# EAGLE board Tema1TSC v59 (EAGLE 9.7.0)
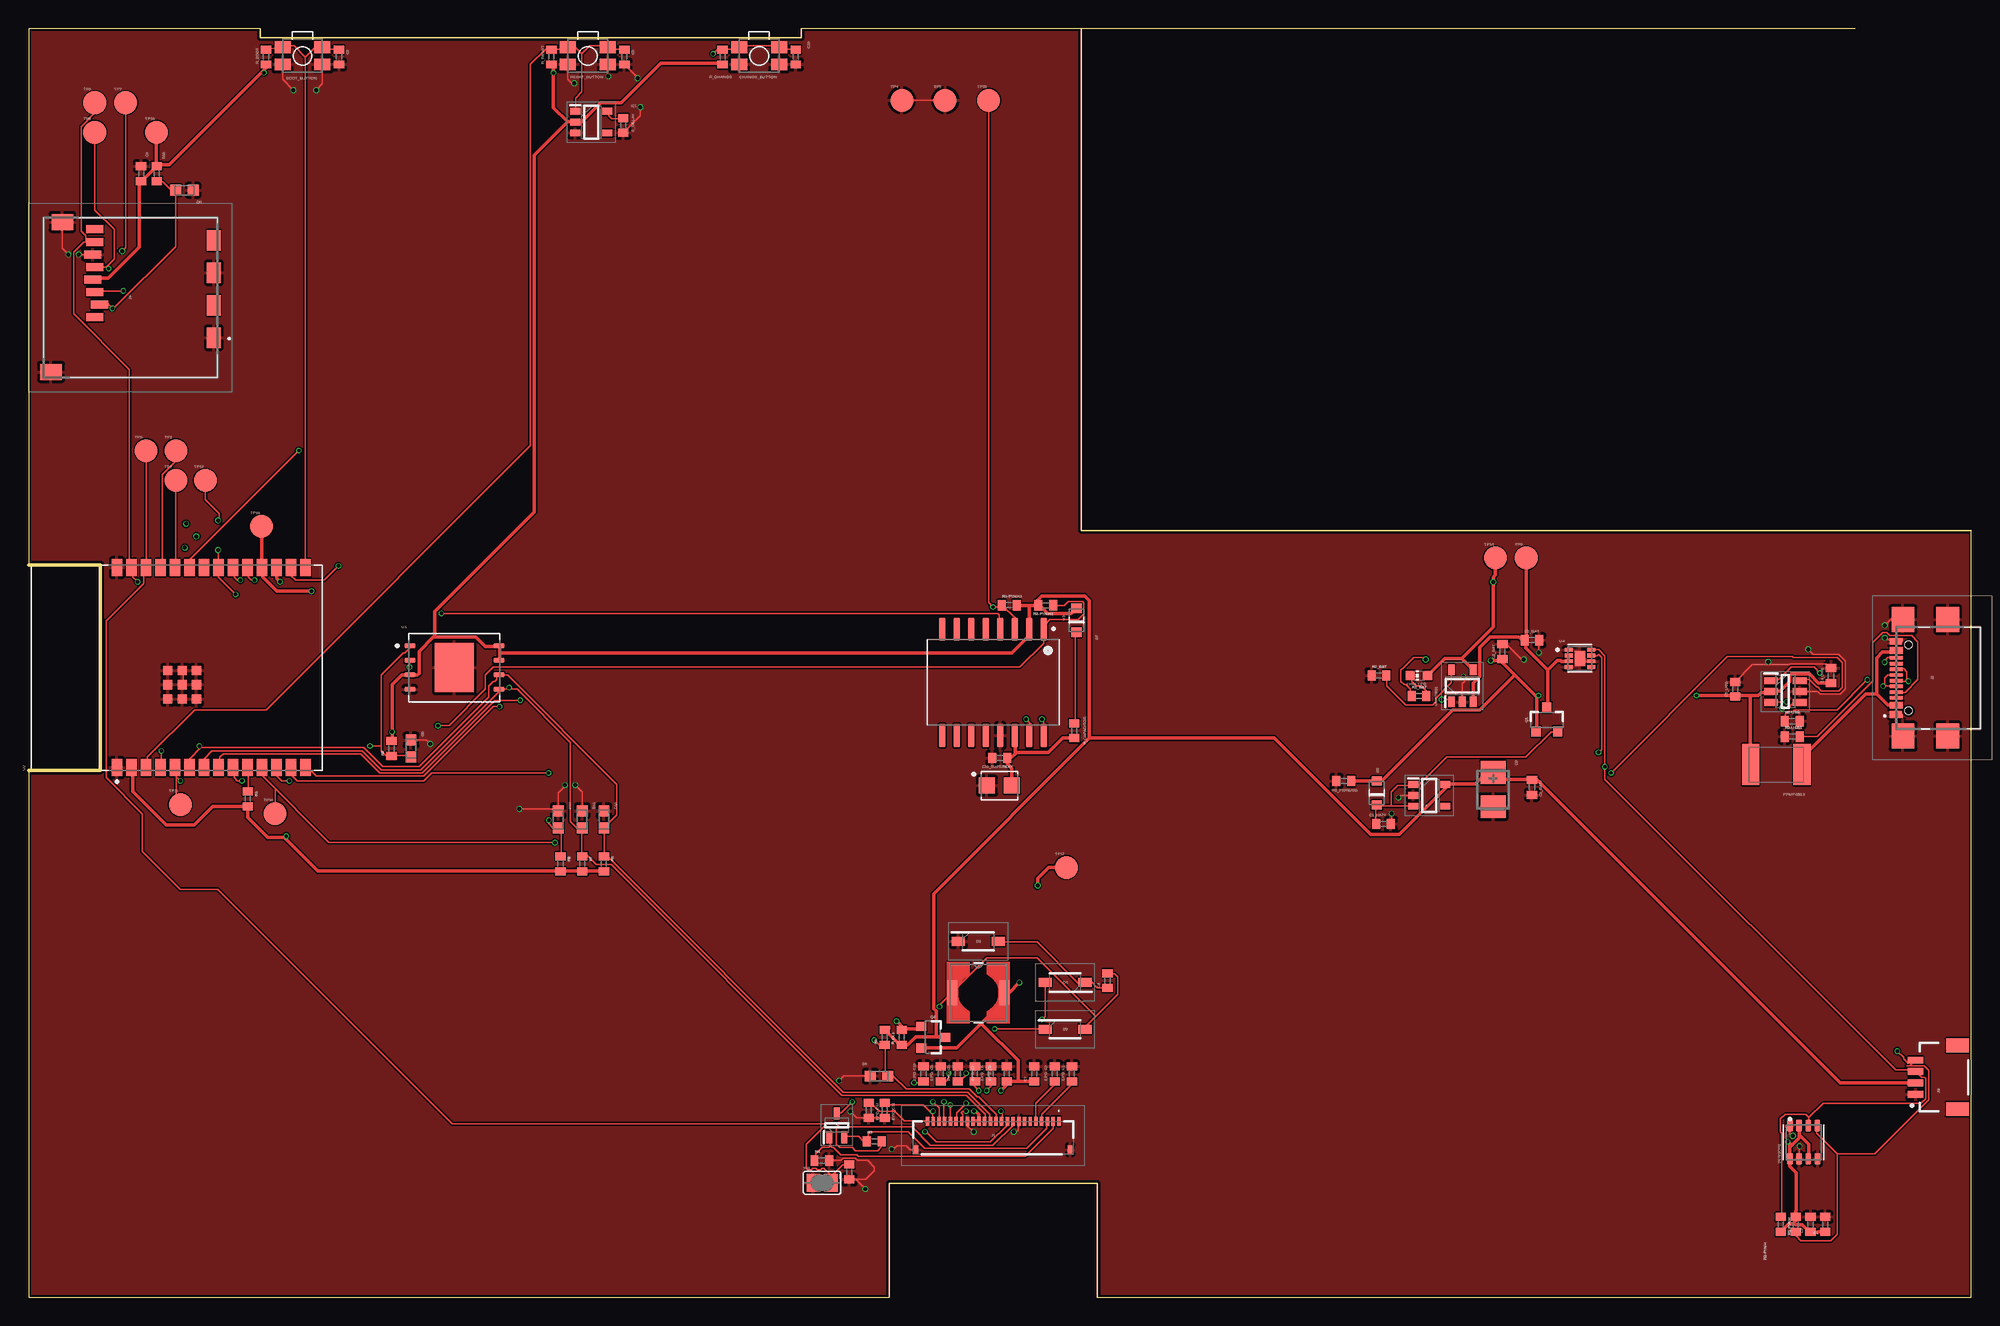
[diagram p0: board, top side]
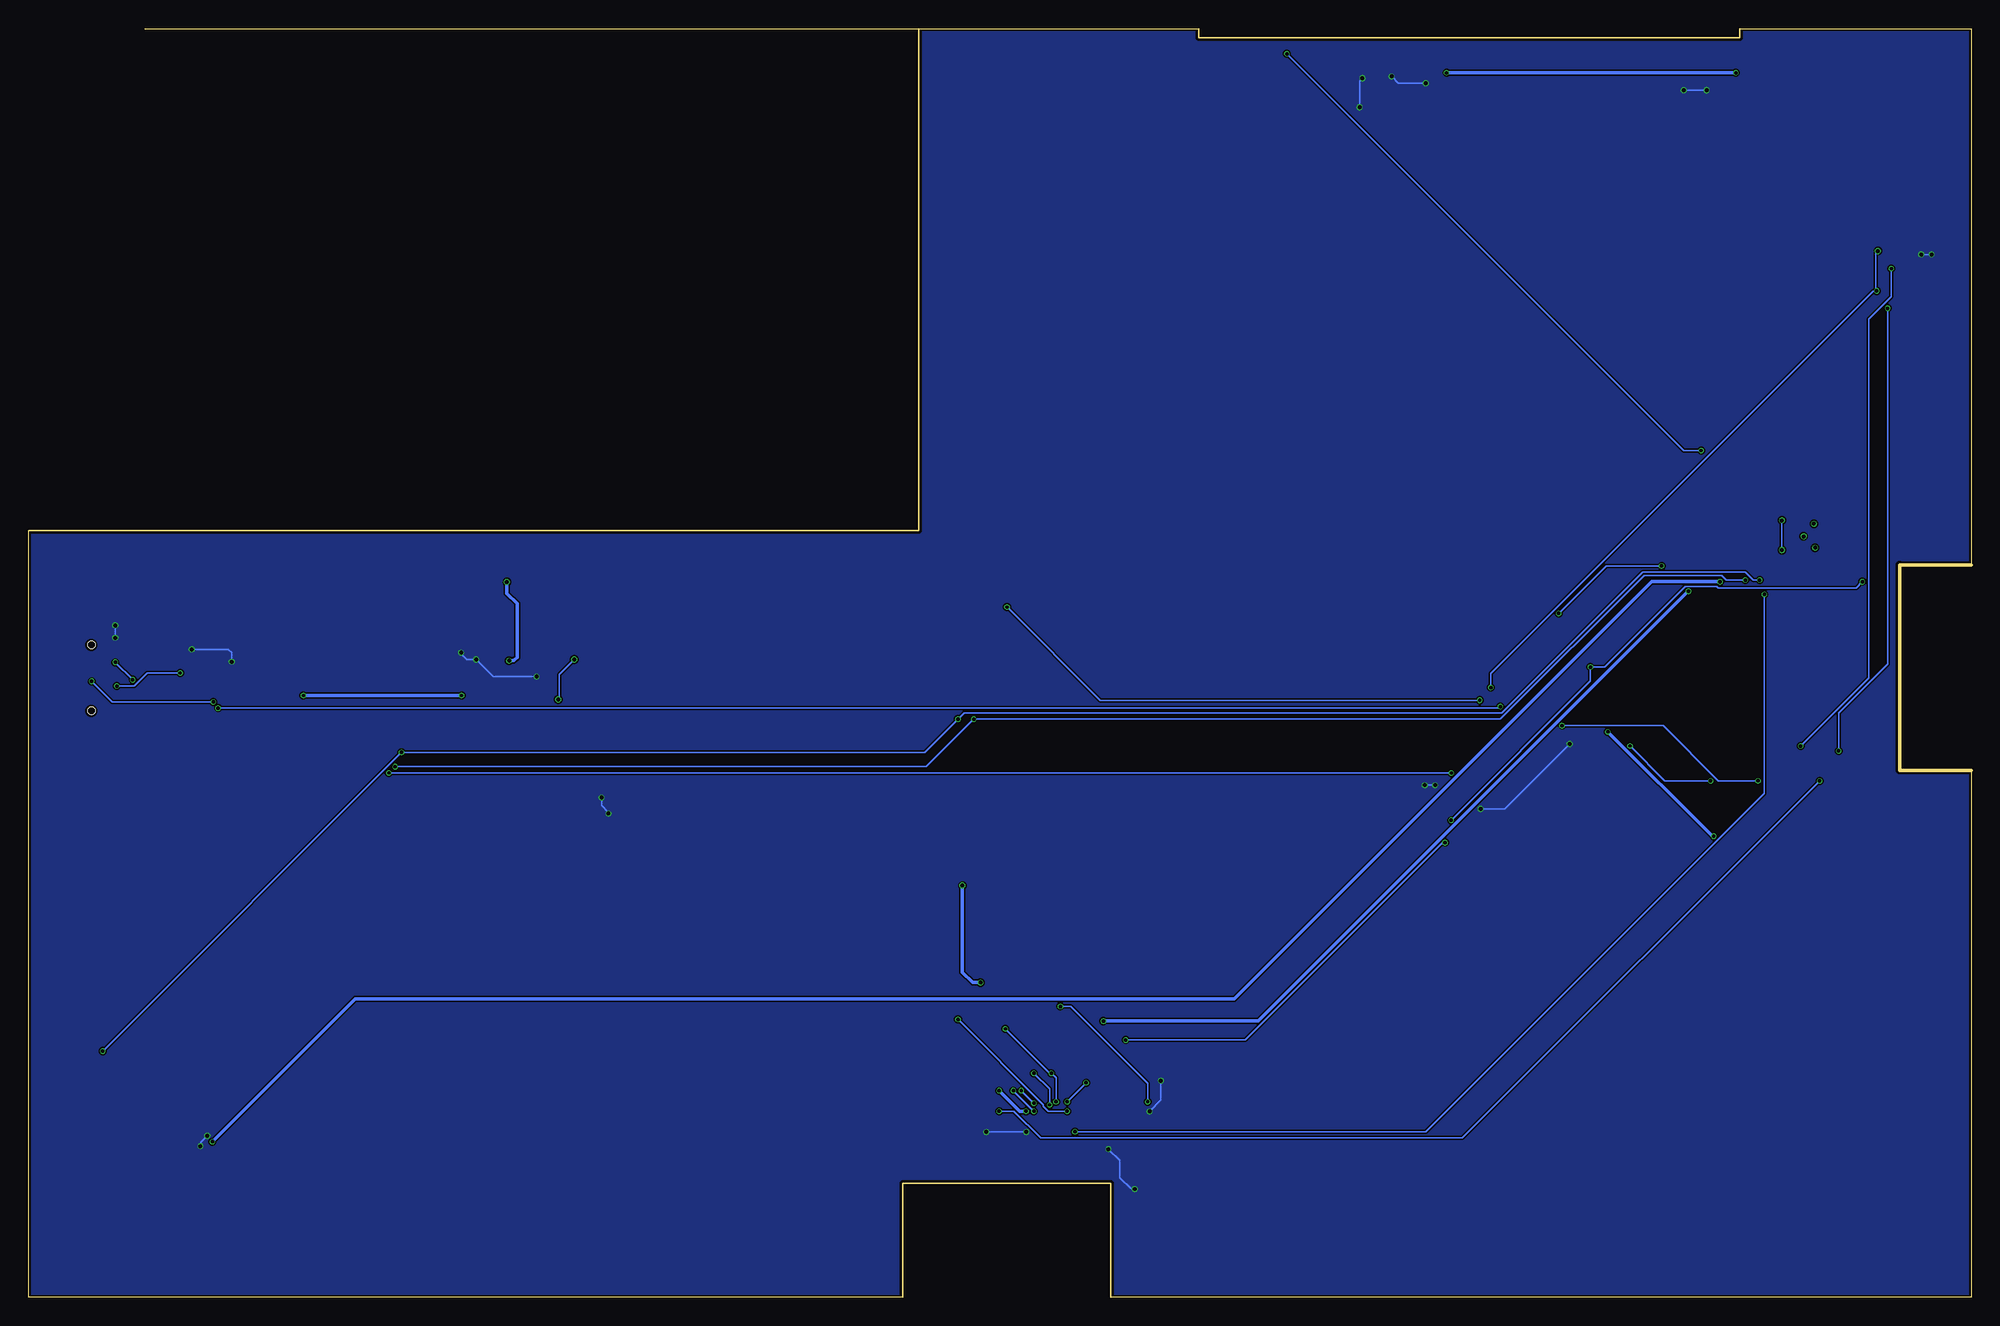
[diagram p1: board, bottom side, seen from below]

Size 170.2 x 111.2 mm. Coordinates in mm from the lower left corner, seen from the top.
Outline: 160,111.2 92.2,111.2
Outline: 92.2,111.2 67.7,111.2 67.7,110.4 20.3,110.4 20.3,111.2 0,111.2 0,64.2 6.3,64.2 6.3,46.2 0,46.2 0,0 75.4,0 75.4,10 93.6,10 93.6,0 170.2,0 170.2,67.2 92.2,67.2 92.2,111.2
Copper layers (1*16): Top 0.035mm / dielectric 1.6mm / Bottom 0.035mm
Design rules "jlcpcb-2layers.dru": minimum track width 0.15mm, minimum drill 0.3mm, track to track 5mil, track to pad 5mil, pad to pad 5mil, via to via 5mil, smd to smd 5mil, copper to edge 0.2mm, drill to drill 6mil, minimum pad ring 10mil, minimum via ring 3mil, stop-mask expansion 4mil, vias tented up to drill 0mil, thermal gap 10mil
Net classes: 1 powertrails: width 0.3 mm

## Footprints (pad centres in the part's own frame; a part is rotated, then mirrored left to right if it is on the bottom)
MYBUTTON = smd 1.4 x 1.05: 1 1.75,0.75; 2 -1.75,0.75; 3 -1.75,-0.75; 4 1.75,-0.75
EAGLE-LTSPICE_C0402 = smd 0.7 x 0.9: 1 -0.65,0; 2 0.65,0
ESP32_WROVER_EAGLE-LTSPICE_C0402 = smd 0.7 x 0.9: 1 -0.65,0; 2 0.65,0
RCL_CT3528 = smd 2 x 2.2: + -1.5,0; - 1.5,0
CAPCP3225X100N = smd 1.4 x 1.4: 1 -1.1,0; 2 1.1,0
ADAFRUIT_CHIP-LED0603 = smd 0.8 x 0.8: A 0,-0.75; C 0,0.75
SOT95P280X145-6N = smd 1.2 x 0.6: 1 -1.25,0.95; 2 -1.25,0; 3 -1.25,-0.95; 4 1.25,-0.95; 5 1.25,0; 6 1.25,0.95
ESP32_WROVER_AVX---SD0805S020S1R0_AVX_SD0805S020S1R0_0 = smd 0.8 x 0.9: 1 -1.05,0; 2 1.05,0
SOD3716X135N = smd 1.15 x 0.8: 1 -1.75,0; 2 1.75,0
DIOC1608X36N = smd 0.97 x 0.94: 1 -0.75,0; 2 0.75,0
SOT95P280X125-5N = smd 0.9 x 0.6: 1 -1.4,0.95; 2 -1.4,0; 3 -1.4,-0.95; 4 1.4,-0.95; 5 1.4,0.95
SOT95P280X120-5N = smd 0.9 x 0.6: 1 -1.4,0.95; 2 -1.4,0; 3 -1.4,-0.95; 4 1.4,-0.95; 5 1.4,0.95
FH34SRJ24S05SH99 = smd 0.3 x 0.8: 1 5.75,1.45; 2 5.25,1.45; 3 4.75,1.45; 4 4.25,1.45; 5 3.75,1.45; 6 3.25,1.45; 7 2.75,1.45; 8 2.25,1.45; 9 1.75,1.45; 10 1.25,1.45; 11 0.75,1.45; 12 0.25,1.45; 13 -0.25,1.45; 14 -0.75,1.45; 15 -1.25,1.45; 16 -1.75,1.45; 17 -2.25,1.45; 18 -2.75,1.45; 19 -3.25,1.45; 20 -3.75,1.45; 21 -4.25,1.45; 22 -4.75,1.45; 23 -5.25,1.45; 24 -5.75,1.45 | smd 0.4 x 0.8: MP1 6.75,-1.05; MP2 -6.75,-1.05
SAMACSYS_PARTS_USB4110GFA = smd 0.3 x 1.15: A1 -3.35,3.678; A4 -2.55,3.678; A5 -1.25,3.678; A6 -0.25,3.678; A7 0.25,3.678; A8 1.25,3.678; A9 2.55,3.678; A12 3.35,3.678; B4 2.25,3.678; B5 1.75,3.678; B6 0.75,3.678; B7 -0.75,3.678; B8 -1.75,3.678; B9 -2.25,3.678 | smd 0.3 x 1.016: B1 3.05,3.729; B12 -3.05,3.729 | smd 2.18 x 2: MP1 -5.11,-0.827; MP2 5.11,-0.827; MP3 -5.11,3.103; MP4 5.11,3.103 | hole 0.65: -2.89,2.603; 2.89,2.603
JST04_1MM_RA = smd 0.6 x 1.35: 1 -1.5,0; 2 -0.5,0; 3 0.5,0; 4 1.5,0 | smd 1.2 x 2: NC1 2.8,-3.675; NC2 -2.8,-3.675
112ATAARR03ATTEND = smd 1.8 x 1.2: G1 10.6,10.4; G2 4.9,10.4; S1 7.75,10.4; S2 2.05,10.4 | smd 1.4 x 1.9: G3 13.6,-3.85; G4 0.45,-2.85 | smd 0.7 x 1.5: P1 8.8,0; P2 7.7,0.4; P3 6.6,0; P4 5.5,-0.2; P5 4.4,0; P6 3.3,-0.2; P7 2.2,0; P8 1.1,0
IND_4828-WE-TPC_WRE = smd 0.889 x 2.159: 1 -2.286,0; 2 2.286,0
ESP32C6_VARISTOR_CT/CN1812 = smd 1.5 x 3.6: 1 -2.25,0; 2 2.25,0
ESP32_WROVER_SPARKFUN-DISCRETESEMI_SOT23-3 = smd 0.8 x 0.9: 1 -0.95,-1; 2 0.95,-1; 3 0,1.1
SOT65P210X110-3N = smd 1.05 x 0.5: 1 -1.05,0.65; 2 -1.05,-0.65; 3 1.05,0
ESP32_WROVER_EAGLE-LTSPICE_R0402 = smd 0.7 x 0.9: 1 -0.65,0; 2 0.65,0
ESP32_WROVER_BME680_PSON80P300X300X100-8N = smd 1.016 x 0.5: 1 1.458,1.2; 2 1.458,0.4; 3 1.458,-0.4; 4 1.458,-1.2; 5 -1.458,-1.22; 6 -1.458,-0.4; 7 -1.458,0.4; 8 -1.458,1.2
SJ = smd 1.168 x 1.6: 1 -0.762,0; 2 0.762,0
TP20R = smd 2 x 2: TP 0,0
SON127P600X800X80-9N = smd 0.94 x 0.44: 1 -3.895,1.905; 2 -3.895,0.635; 3 -3.895,-0.635; 4 -3.895,-1.905; 5 3.895,-1.905; 6 3.895,-0.635; 7 3.895,0.635; 8 3.895,1.905 | smd 3.4 x 4.3: 9 0,0
XCVR_ESP32-C6-WROOM-1-N8 = smd 1.5 x 0.9: 1 -8.75,5.26; 2 -8.75,3.99; 3 -8.75,2.72; 4 -8.75,1.45; 5 -8.75,0.18; 6 -8.75,-1.09; 7 -8.75,-2.36; 8 -8.75,-3.63; 9 -8.75,-4.9; 10 -8.75,-6.17; 11 -8.75,-7.44; 12 -8.75,-8.71; 13 -8.75,-9.98; 14 -8.75,-11.25; 15 8.75,-11.25; 16 8.75,-9.98; 17 8.75,-8.71; 18 8.75,-7.44; 19 8.75,-6.17; 20 8.75,-4.9; 21 8.75,-3.63; 22 8.75,-2.36; 23 8.75,-1.09; 24 8.75,0.18; 25 8.75,1.45; 26 8.75,2.72; 27 8.75,3.99; 28 8.75,5.26 | smd 0.8 x 0.8: 29_1 -2.755,0.79; 29_2 -1.505,0.79; 29_3 -0.255,0.79; 29_4 -2.755,-0.46; 29_5 -1.505,-0.46; 29_6 -0.255,-0.46; 29_7 -2.755,-1.71; 29_8 -1.505,-1.71; 29_9 -0.255,-1.71
SOIC127P1032X265-16N = smd 2.05 x 0.59: 1 -4.655,4.445; 2 -4.655,3.175; 3 -4.655,1.905; 4 -4.655,0.635; 5 -4.655,-0.635; 6 -4.655,-1.905; 7 -4.655,-3.175; 8 -4.655,-4.445; 9 4.655,-4.445; 10 4.655,-3.175; 11 4.655,-1.905; 12 4.655,-0.635; 13 4.655,0.635; 14 4.655,1.905; 15 4.655,3.175; 16 4.655,4.445
SON50P200X200X80-9N = smd 0.76 x 0.31: 1 -0.985,0.75; 2 -0.985,0.25; 3 -0.985,-0.25; 4 -0.985,-0.75; 5 0.985,-0.75; 6 0.985,-0.25; 7 0.985,0.25; 8 0.985,0.75 | smd 0.9 x 1.3: 9 0,0

## Placement (x,y rotation side)
BOOT_BUTTON  BUTTON_CUSYOMV1  [MYBUTTON]  24,108.8 180 top
C1  100nF  [EAGLE-LTSPICE_C0402]  157.4,6.4 90 top
C1_BAT  4.7uF  [EAGLE-LTSPICE_C0402]  129.11,56.61 90 top
C1_BAT1  4.7uF  [ESP32_WROVER_EAGLE-LTSPICE_C0402]  118.7,41.5 0 top
C1_BAT2  4.7uF  [ESP32_WROVER_EAGLE-LTSPICE_C0402]  131.7,44.7 270 top
C2  100nF  [EAGLE-LTSPICE_C0402]  156.1,6.4 90 top
C2_BAT  4.7uF  [EAGLE-LTSPICE_C0402]  131.7,57.6 0 top
C3  100uF TNAT  [RCL_CT3528]  128.3,44.5 270 top
C4  4.7uF/25V  [EAGLE-LTSPICE_C0402]  94.52,27.77 90 top
C4_USB  100nF  [ESP32_WROVER_EAGLE-LTSPICE_C0402]  157.9,54.5 90 top
C5  1uF  [EAGLE-LTSPICE_C0402]  52.2,108.7 270 top
C5_USB  4.7uF  [ESP32_WROVER_EAGLE-LTSPICE_C0402]  149.5,53.3 90 top
C6  100nF  [EAGLE-LTSPICE_C0402]  27.2,108.7 270 top
C7  10uF  [EAGLE-LTSPICE_C0402]  88.1,19.6 90 top
C8  100nF  [EAGLE-LTSPICE_C0402]  85.08,47.27 180 top
C9  100nF  [EAGLE-LTSPICE_C0402]  9.86,98.49 90 top
C10  100nF  [EAGLE-LTSPICE_C0402]  67.2,108.7 270 top
C10_SUPERCAP  CPH3225A  [CAPCP3225X100N]  85.05,44.87 0 top
C_DELAY  100nF  [EAGLE-LTSPICE_C0402]  52.1,102.7 270 top
CHANGE_BUTTON  BUTTON_CUSYOMV1  [MYBUTTON]  64,108.8 180 top
CHG_LED  [ADAFRUIT_CHIP-LED0603]  121.8,54.5 90 top
D1  USBLC6-2SC6Y  [SOT95P280X145-6N]  153.9,53.1 0 top
D2  ESP32_WROVER_AVX---SD0805S020S1R0_AVX_SD0805S020S1R0_0_0AVX_SD0805S020S1R0_0_0  [ESP32_WROVER_AVX---SD0805S020S1R0_AVX_SD0805S020S1R0_0]  118.1,44.2 90 top
D3  MBR0530  [SOD3716X135N]  83.2,31.2 0 top
D4  MBR0530  [SOD3716X135N]  90.8,27.6 180 top
D5  MBR0530  [SOD3716X135N]  90.8,23.5 0 top
D6  PGB1010603MR  [DIOC1608X36N]  74.5,19.4 0 top
D7  ESP32_WROVER_AVX---SD0805S020S1R0_AVX_SD0805S020S1R0_0_0AVX_SD0805S020S1R0_0_0  [ESP32_WROVER_AVX---SD0805S020S1R0_AVX_SD0805S020S1R0_0]  91.8,59.34 90 top
D8  PGB1010603MR  [DIOC1608X36N]  13.66,97.03 180 top
D9  PGB1010603MR  [DIOC1608X36N]  33.5,48.1 270 top
D10  PGB1010603MR  [DIOC1608X36N]  50.4,41.9 270 top
D11  PGB1010603MR  [DIOC1608X36N]  48.5,41.9 270 top
D12  PGB1010603MR  [DIOC1608X36N]  46.4,41.9 270 top
EPD_C1  1uF/50V  [EAGLE-LTSPICE_C0402]  91.4,19.6 90 top
EPD_C2  1uF/50V  [EAGLE-LTSPICE_C0402]  89.9,19.6 90 top
EPD_C5  1uF/50V  [EAGLE-LTSPICE_C0402]  85.7,19.6 90 top
EPD_C6  1uF/50V  [EAGLE-LTSPICE_C0402]  84.3,19.6 90 top
EPD_C7  1uF/50V  [EAGLE-LTSPICE_C0402]  82.9,19.6 90 top
EPD_C8  1uF/50V  [EAGLE-LTSPICE_C0402]  81.4,19.6 90 top
EPD_C9  1uF/50V  [EAGLE-LTSPICE_C0402]  79.9,19.6 90 top
EPD_C10  1uF/50V  [EAGLE-LTSPICE_C0402]  78.4,19.6 90 top
EPD_C11  1uF/50V  [EAGLE-LTSPICE_C0402]  75,16.4 270 top
EPD_C12  1uF/50V  [EAGLE-LTSPICE_C0402]  73.6,16.4 270 top
IC1  BD5229G-TR  [SOT95P280X125-5N]  49.3,103 0 top
IC4  XC6220A331MR-G  [SOT95P280X120-5N]  122.7,44 0 top
J1  FH34SRJ-24S-0.5SH_99_  [FH34SRJ24S05SH99]  84.5,14 0 top
J2  SAMACSYS_PARTS_USB4110-GF-A  [SAMACSYS_PARTS_USB4110GFA]  167.3,54.3 90 top
J3  QWIIC_RIGHT_ANGLE  [JST04_1MM_RA]  165.3,19.3 90 top
J4  112A-TAAR-R03_ATTEND  [112ATAARR03ATTEND]  5.82,94.7 270 top
L1  68uH  [IND_4828-WE-TPC_WRE]  83.2,26.7 0 top
MCP73831  ESP32_WROVER_SPARKFUN-IC-POWER_MCP73831  [SOT95P280X125-5N]  125.6,53.6 90 top
PFMF.050.1  ESP32C6_VARISTORCN1812  [ESP32C6_VARISTOR_CT/CN1812]  153.1,46.7 180 top
Q1  20V/4.2A/52mΩ/1.4W  [ESP32_WROVER_SPARKFUN-DISCRETESEMI_SOT23-3]  133,50.6 0 top
Q2  20V/4.2A/52mΩ/1.4W  [ESP32_WROVER_SPARKFUN-DISCRETESEMI_SOT23-3]  79.2,22.8 270 top
Q3  SI1308EDL-T1-GE3  [SOT65P210X110-3N]  70.8,15.1 90 top
R1  10K  [ESP32_WROVER_EAGLE-LTSPICE_R0402]  19.2,43.7 270 top
R1-PINH  10K  [ESP32_WROVER_EAGLE-LTSPICE_R0402]  153.5,6.4 270 top
R1-PINH1  10K  [ESP32_WROVER_EAGLE-LTSPICE_R0402]  85.9,60.67 0 top
R1_BAT  200  [ESP32_WROVER_EAGLE-LTSPICE_R0402]  121.8,52.7 0 top
R1_PWRUSB  100K  [ESP32_WROVER_EAGLE-LTSPICE_R0402]  115.21,45.27 0 top
R2  2.2  [ESP32_WROVER_EAGLE-LTSPICE_R0402]  71.9,11 90 top
R2-PINH  10K  [ESP32_WROVER_EAGLE-LTSPICE_R0402]  154.8,6.4 90 top
R2-PINH1  10K  [ESP32_WROVER_EAGLE-LTSPICE_R0402]  89.11,60.65 179.8 top
R2-USB  5k1  [ESP32_WROVER_EAGLE-LTSPICE_R0402]  154.5,50.5 0 top
R2-USB1  5k1  [ESP32_WROVER_EAGLE-LTSPICE_R0402]  154.49,49.15 0 top
R2_BAT  2K  [ESP32_WROVER_EAGLE-LTSPICE_R0402]  118.3,54.5 0 top
R3  0.47  [ESP32_WROVER_EAGLE-LTSPICE_R0402]  74.09,13.69 0 top
R4  10K  [ESP32_WROVER_EAGLE-LTSPICE_R0402]  69.5,12 0 top
R5  10K  [ESP32_WROVER_EAGLE-LTSPICE_R0402]  31.8,48.1 90 top
R6  10K  [ESP32_WROVER_EAGLE-LTSPICE_R0402]  50.4,38 270 top
R7  10K  [ESP32_WROVER_EAGLE-LTSPICE_R0402]  48.5,38 270 top
R8  10K  [ESP32_WROVER_EAGLE-LTSPICE_R0402]  46.6,38 270 top
R9  10K  [ESP32_WROVER_EAGLE-LTSPICE_R0402]  75,22.8 89.1 top
R10  10K  [ESP32_WROVER_EAGLE-LTSPICE_R0402]  11.23,98.49 90 top
R_BOOT  10K  [ESP32_WROVER_EAGLE-LTSPICE_R0402]  20.8,108.7 90 top
R_CAPACITOR  15  [ESP32_WROVER_EAGLE-LTSPICE_R0402]  91.61,49.67 90 top
R_CHANGE  10K  [ESP32_WROVER_EAGLE-LTSPICE_R0402]  60.8,108.7 90 top
R_CL1  10K  [ESP32_WROVER_EAGLE-LTSPICE_R0402]  76.5,22.8 90 top
R_RESET  10K  [ESP32_WROVER_EAGLE-LTSPICE_R0402]  45.8,108.7 270 top
RESET_BUTTON  BUTTON_CUSYOMV1  [MYBUTTON]  49,108.8 180 top
SENSOR2  ESP32_WROVER_BME680_BME680  [ESP32_WROVER_BME680_PSON80P300X300X100-8N]  155.5,13.6 90 top
SJ1  [SJ]  69.52,10.05 0 top
TP1  TPTP20R  [TP20R]  12.9,74.2 0 top
TP2  TPTP20R  [TP20R]  12.9,71.6 0 top
TP3  TPTP20R  [TP20R]  131.2,64.8 0 top
TP4  TPTP20R  [TP20R]  76.5,104.9 0 top
TP5  TPTP20R  [TP20R]  80.3,104.9 0 top
TP6  TPTP20R  [TP20R]  5.8,104.7 0 top
TP7  TPTP20R  [TP20R]  8.5,104.7 0 top
TP8  TPTP20R  [TP20R]  5.8,102.1 0 top
TP9  TPTP20R  [TP20R]  10.3,74.2 0 top
TP10  TPTP20R  [TP20R]  21.6,42.4 0 top
TP11  TPTP20R  [TP20R]  13.3,43.2 0 top
TP12  TPTP20R  [TP20R]  15.5,71.6 0 top
TP13  TPTP20R  [TP20R]  20.42,67.57 0 top
TP14  TPTP20R  [TP20R]  128.5,64.8 0 top
TP15  TPTP20R  [TP20R]  84.1,104.9 0 top
TP16  TPTP20R  [TP20R]  11.2,102.1 0 top
TP17  TPTP20R  [TP20R]  90.92,37.67 0 top
U1  W25Q512JVEIQ  [SON127P600X800X80-9N]  37.3,55.2 0 top
U2  ESP32-C6-WROOM-1-N8  [XCVR_ESP32-C6-WROOM-1-N8]  13,55.2 90 top
U3  DS3231SN#  [SOIC127P1032X265-16N]  84.5,53.9 270 top
U4  MAX17048G+T10  [SON50P200X200X80-9N]  135.9,56 0 top

## Library data of the parts
BOOT_BUTTON CHANGE_BUTTON CHG_LED PFMF.050.1 RESET_BUTTON SJ1 TP1-TP17 = DeskAssistant v19 v1
C1 C1_BAT C1_BAT1 C1_BAT2 C2 C2_BAT C4 C4_USB C5 C5_USB C6-C10 C_DELAY EPD_C1 EPD_C2 EPD_C5-EPD_C12 = DeskAssistant v19 v1; SPICEMODEL: NONE; SPICEPREFIX: C
C3 = DeskAssistant v19 v1; SPICEPREFIX: C
C10_SUPERCAP = DeskAssistant v19 v1; AVAILABILITY: Not in stock; CHECK_PRICES: https://www.snapeda.com/parts/CPH3225A/Seiko+Instruments/view-part/?ref=eda; DESCRIPTION: 11 mF (EDLC) Supercapacitor 3.3 V 1210 (3225 Metric) - -; MF: Seiko Instruments; MP: CPH3225A; PACKAGE: 1210 Seiko; PRICE: None; PURCHASE-URL: https://www.snapeda.com/api/url_track_click_mouser/?unipart_id=562593&manufacturer=Seiko Instruments&part_name=CPH3225A&search_term=None; SNAPEDA_LINK: https://www.snapeda.com/parts/CPH3225A/Seiko+Instruments/view-part/?ref=snap
D1 = DeskAssistant v19 v1; AVAILABILITY: In Stock; CHECK_PRICES: https://www.snapeda.com/parts/USBLC6-2SC6Y/STMicroelectronics/view-part/?ref=eda; DESCRIPTION: 17V Clamp 5A (8/20µs) Ipp Tvs Diode Surface Mount SOT-23-6; MF: STMicroelectronics; MP: USBLC6-2SC6Y; PACKAGE: SOT-23-6 STMicroelectronics; PRICE: None; SNAPEDA_LINK: https://www.snapeda.com/parts/USBLC6-2SC6Y/STMicroelectronics/view-part/?ref=snap
D2 D7 = DeskAssistant v19 v1; CENTROID_NOT_SPECIFIED: No; DATASHEET: http://datasheets.avx.com/schottky.pdf; DIGIKEY_DESCRIPTION: DIODE SCHOTTKY 20V 1A 0805; DIGIKEY_PART_NUMBER: 478-7800-1-ND; LEAD_FREE: yes; MF: AVX; MOUSER_PART_NUMBER: 581-SD0805S020S1R0; PACKAGE: 0805 (2012 metric); PREFIX: D; ROHS: yes; TEMPERATURE_RANGE_HIGH: +125°C; TEMPERATURE_RANGE_LOW: -55°C
D3-D5 = DeskAssistant v19 v1; AVAILABILITY: In Stock; CHECK_PRICES: https://www.snapeda.com/parts/MBR0530/Onsemi/view-part/?ref=eda; DESCRIPTION: Diode Schottky 30 V 500mA Surface Mount SOD-123; MF: ON Semiconductor; MP: MBR0530; PACKAGE: SOD-123-2 ON Semiconductor; PRICE: None; PURCHASE-URL: https://www.snapeda.com/api/url_track_click_mouser/?unipart_id=179458&manufacturer=ON Semiconductor&part_name=MBR0530&search_term=None; SNAPEDA_LINK: https://www.snapeda.com/parts/MBR0530/Onsemi/view-part/?ref=snap
D6 D8-D12 = DeskAssistant v19 v1; AVAILABILITY: In Stock; CHECK_PRICES: https://www.snapeda.com/parts/PGB1010603MR/Littelfuse/view-part/?ref=eda; DESCRIPTION: 150V (Typ) Clamp - Ipp Tvs Diode Surface Mount 0603 (1608 Metric); MF: Littelfuse Inc.; MP: PGB1010603MR; PACKAGE: 0603 Littelfuse Inc.; PRICE: None; PURCHASE-URL: https://www.snapeda.com/api/url_track_click_mouser/?unipart_id=5659453&manufacturer=Littelfuse Inc.&part_name=PGB1010603MR&search_term=None; SNAPEDA_LINK: https://www.snapeda.com/parts/PGB1010603MR/Littelfuse/view-part/?ref=snap
IC1 = DeskAssistant v19 v1; DESCRIPTION: Voltage Detector with Adjustable Delay Time: CMOS processes are utilized to develop high precision, low current consumption CMOS reset ICs that allow arbitrary setting of the delay time. The extensive lineup includes both Nch Open Drain and CMOS output types in a wide range of detection voltages (from 2.3V to 6.0V, in 0.1V steps), enabling selection of the ideal solution based on customer requirements. In addition, the entire series is of course both lead-free and RoHS-compliant.; HEIGHT: 1.25mm; MANUFACTURER_NAME: ROHM Semiconductor; MANUFACTURER_PART_NUMBER: BD5229G-TR; MOUSER_PART_NUMBER: 755-BD5229G-TR; MOUSER_PRICE-STOCK: https://www.mouser.co.uk/ProductDetail/ROHM-Semiconductor/BD5229G-TR?qs=4kLU8WoGk0vvnhrrYwdszw%3D%3D
IC4 = DeskAssistant v19 v1; DESCRIPTION: LDO Voltage Regulators; HEIGHT: 1.2mm; MANUFACTURER_NAME: Torex; MANUFACTURER_PART_NUMBER: XC6220A331MR-G; MOUSER_PART_NUMBER: 865-XC6220A331MR-G; MOUSER_PRICE-STOCK: https://www.mouser.co.uk/ProductDetail/Torex-Semiconductor/XC6220A331MR-G?qs=AsjdqWjXhJ8ZSWznL1J0gg%3D%3D
J1 = DeskAssistant v19 v1; DESCRIPTION: 24 Position FFC, FPC Connector Contacts, Top and Bottom 0.020" (0.50mm) Surface Mount, Right Angle; HEIGHT: 1.1mm; MANUFACTURER_NAME: Hirose; MANUFACTURER_PART_NUMBER: FH34SRJ-24S-0.5SH(99); MOUSER_PART_NUMBER: 798-FH34SRJ24S05SH99; MOUSER_PRICE-STOCK: https://www.mouser.co.uk/ProductDetail/Hirose-Connector/FH34SRJ-24S-0.5SH99?qs=vcbW%252B4%252BSTIpKBl5ap9J8Fw%3D%3D
J2 = DeskAssistant v19 v1; DESCRIPTION: CONN USB 2.0 TYPE-C R/A SMT; HEIGHT: 3.26mm; MANUFACTURER_NAME: GCT (GLOBAL CONNECTOR TECHNOLOGY); MANUFACTURER_PART_NUMBER: USB4110-GF-A; MOUSER_PART_NUMBER: 640-USB4110-GF-A; MOUSER_PRICE-STOCK: https://www.mouser.co.uk/ProductDetail/GCT/USB4110-GF-A?qs=KUoIvG%2F9IlYiZvIXQjyJeA%3D%3D
J3 = DeskAssistant v19 v1; PROD_ID: CONN-13694
J4 = DeskAssistant v19 v1; DESCRIPTION: Micro SD Card Socket, Push-Push Type, Top Mount, SMT, H=1.83mm, 10u; HEIGHT: 1.9mm; MANUFACTURER_NAME: ATTEND; MANUFACTURER_PART_NUMBER: 112A-TAAR-R03 ATTEND
L1 = DeskAssistant v19 v1; COPYRIGHT: Copyright (C) 2024 Ultra Librarian. All rights reserved.; MANUFACTURER_PART_NUMBER: 744043680; MFR_NAME: Wurth Electronics
MCP73831 = DeskAssistant v19 v1; PROD_ID: IC-09995
Q1 Q2 = DeskAssistant v19 v1; PROD_ID: TRAN-14388
Q3 = DeskAssistant v19 v1; AVAILABILITY: In Stock; CHECK_PRICES: https://www.snapeda.com/parts/SI1308EDL-T1-GE3/Vishay+Siliconix/view-part/?ref=eda; DESCRIPTION: Si1308EDL-T1-GE3 N-channel MOSFET Transistor, 1.5 A, 30 V, 3-Pin SC-70 | Siliconix / Vishay SI1308EDL-T1-GE3; MF: Vishay Siliconix; MP: SI1308EDL-T1-GE3; PACKAGE: SOT-323 Vishay Semiconductor; PRICE: None; PURCHASE-URL: https://www.snapeda.com/api/url_track_click_mouser/?unipart_id=274603&manufacturer=Vishay Siliconix&part_name=SI1308EDL-T1-GE3&search_term=None; SNAPEDA_LINK: https://www.snapeda.com/parts/SI1308EDL-T1-GE3/Vishay+Siliconix/view-part/?ref=snap
R1 R1-PINH R1-PINH1 R1_BAT R1_PWRUSB R2 R2-PINH R2-PINH1 R2-USB R2-USB1 R2_BAT R3-R10 R_BOOT R_CAPACITOR R_CHANGE R_CL1 R_RESET = DeskAssistant v19 v1; SPICEMODEL: NONE; SPICEPREFIX: R
SENSOR2 = DeskAssistant v19 v1; AVAILABILITY: Unavailable; DESCRIPTION: Integrated Environmental Unit; MF: Bosch Sensortec; MP: BME680; PACKAGE: LGA-8 Bosch Tools; PRICE: None
U1 = DeskAssistant v19 v1; AVAILABILITY: In Stock; CHECK_PRICES: https://www.snapeda.com/parts/W25Q512JVEIQ/Winbond+Electronics/view-part/?ref=eda; DESCRIPTION: FLASH - NOR Memory IC 512Mb (64M x 8) SPI - Quad I/O 133 MHz 8-WSON (8x6); MF: Winbond Electronics; MP: W25Q512JVEIQ; PACKAGE: Package; PRICE: None; SNAPEDA_LINK: https://www.snapeda.com/parts/W25Q512JVEIQ/Winbond+Electronics/view-part/?ref=snap
U2 = DeskAssistant v19 v1; AVAILABILITY: In Stock; CHECK_PRICES: https://www.snapeda.com/parts/ESP32-C6-WROOM-1-N8/Espressif+Systems/view-part/?ref=eda; DESCRIPTION: Multiprotocol Modules ESP32-C6 module, Wi-Fi 6 in 2.4 GHz band, Bluetooth 5, Zigbee 3.0 and Thread. ESP34-WROOM Compatible - ENGINEERING SAMPLE; MF: Espressif Systems; MP: ESP32-C6-WROOM-1-N8; PACKAGE: None; PRICE: None; SNAPEDA_LINK: https://www.snapeda.com/parts/ESP32-C6-WROOM-1-N8/Espressif+Systems/view-part/?ref=snap
U3 = DeskAssistant v19 v1; AVAILABILITY: In Stock; CHECK_PRICES: https://www.snapeda.com/parts/DS3231SN%23/Analog+Devices/view-part/?ref=eda; DESCRIPTION: Extremely Accurate I²C-Integrated RTC/TCXO/Crystal; MF: Analog Devices; MP: DS3231SN#; PACKAGE: SOIC-16 Maxim; PRICE: None; PURCHASE-URL: https://www.snapeda.com/api/url_track_click_mouser/?unipart_id=99048&manufacturer=Analog Devices&part_name=DS3231SN#&search_term=None; SNAPEDA_LINK: https://www.snapeda.com/parts/DS3231SN%23/Analog+Devices/view-part/?ref=snap
U4 = DeskAssistant v19 v1; AVAILABILITY: In Stock; CHECK_PRICES: https://www.snapeda.com/parts/MAX17048G+T10/Analog+Devices/view-part/?ref=eda; DESCRIPTION: 3µA 1-Cell/2-Cell Fuel Gauge with ModelGauge; MF: Analog Devices; MP: MAX17048G+T10; PACKAGE: TDFN-8 Maxim; PRICE: None; PURCHASE-URL: https://www.snapeda.com/api/url_track_click_mouser/?unipart_id=329239&manufacturer=Analog Devices&part_name=MAX17048G+T10&search_term=None; SNAPEDA_LINK: https://www.snapeda.com/parts/MAX17048G+T10/Analog+Devices/view-part/?ref=snap

## Nets
3V3 [powertrails]: C1_BAT2.1 C3.+ C9.1 D7.2 IC1.2 IC4.5 J3.2 J4.P4 Q2.3 R1-PINH1.2 R1.2 R2-PINH1.2 R5.2 R6.2 R7.2 R8.2 R9.2 R10.2 R_BOOT.1 R_CHANGE.1 R_CL1.1 R_RESET.2 TP16.TP U1.3 U1.7 U1.8 U2.2 U3.2
32KHZ: R2-PINH1.1 U2.9 U3.1
DN: D1.1 J2.A7 J2.B7
DP: D1.3 J2.A6 J2.B6
EPD_3V3 [powertrails]: C7.1 EPD_C5.1 J1.15 J1.16 L1.2 Q2.2 TP17.TP
EPD_3V3_C [powertrails]: Q2.1 R_CL1.2 TP13.TP U2.18
EPD_BUSY: J1.9 TP9.TP U2.26
EPD_CS: D6.2 J1.12 R9.1 TP10.TP U2.11
EPD_DC: J1.11 TP11.TP U2.5
EPD_RST: J1.10 TP12.TP U2.21
FLASH_CS: D9.2 R5.1 U1.1 U2.12
GDR: J1.2 Q3.1 R4.1
GND: BOOT_BUTTON.1 BOOT_BUTTON.2 C1.2 C1_BAT1.2 C1_BAT2.2 C1_BAT.2 C2.2 C2_BAT.2 C3.- C4_USB.2 C5.2 C5_USB.2 C6.2 C7.2 C8.2 C9.2 C10.2 C10_SUPERCAP.1 C_DELAY.2 CHANGE_BUTTON.1 CHANGE_BUTTON.2 D1.5 D3.1 D6.1 D8.1 D9.1 D10.1 D11.1 D12.1 EPD_C1.2 EPD_C2.2 EPD_C5.2 EPD_C6.2 EPD_C7.2 EPD_C8.2 EPD_C9.2 EPD_C10.2 EPD_C11.2 EPD_C12.2 IC1.3 IC4.2 J1.8 J1.17 J1.MP1 J1.MP2 J2.A1 J2.A12 J2.B1 J2.B12 J2.MP1 J2.MP2 J2.MP3 J2.MP4 J3.1 J4.G1 J4.G2 J4.G3 J4.G4 J4.P6 MCP73831.2 R1_PWRUSB.1 R2-USB1.1 R2-USB.2 R2.1 R2_BAT.1 R4.2 RESET_BUTTON.1 RESET_BUTTON.2 SENSOR2.1 SENSOR2.5 SENSOR2.7 SJ1.1 TP4.TP TP5.TP U1.4 U1.9 U2.1 U2.28 U2.29_1 U2.29_2 U2.29_3 U2.29_4 U2.29_5 U2.29_6 U2.29_7 U2.29_8 U2.29_9 U3.13 U4.1 U4.4 U4.6 U4.9
GPIO8: R1.1 U2.10
I2C_PW [powertrails]: C1.1 C2.1 R1-PINH.2 R2-PINH.2 SENSOR2.2 SENSOR2.6 SENSOR2.8 U2.17
INT_RTC: R1-PINH1.1 TP15.TP U2.8 U3.3
IO/BOOT: BOOT_BUTTON.3 BOOT_BUTTON.4 C6.1 R_BOOT.2 U2.15
IO/CHANGE: C10.1 CHANGE_BUTTON.3 CHANGE_BUTTON.4 R_CHANGE.2 U2.23
MISO: D12.2 J4.P7 R8.1 TP6.TP U1.2 U2.27
MOSI: D11.2 J1.14 J4.P3 R7.1 TP7.TP U1.5 U2.7
N$1: J2.B5 R2-USB.1
N$2: C1_BAT1.1 D2.1 IC4.1 IC4.3 Q1.2
N$3: MCP73831.1 R1_BAT.1
N$4: J2.A5 R2-USB1.2
N$5: CHG_LED.C R1_BAT.2
N$6: C4.1 D3.2 D4.1
N$7: EPD_C12.1 J1.24
N$8: MCP73831.5 R2_BAT.2
N$9: C_DELAY.1 IC1.5
N$10: EPD_C10.1 J1.22
N$12: EPD_C8.1 J1.20
N$13: EPD_C7.1 J1.19
N$14: EPD_C6.1 J1.18
N$15: D7.1 R_CAPACITOR.2
N$22: EPD_C1.1 J1.4
N$23: EPD_C2.1 J1.5
PREVGH: D5.1 EPD_C9.1 J1.21
PREVGL: D4.2 EPD_C11.1 J1.23
RESE: J1.3 Q3.2 R3.1
RESE': R2.2 R3.2 SJ1.2
RESET: C5.1 IC1.1 R_RESET.1 RESET_BUTTON.3 RESET_BUTTON.4 U2.3
RTC_RST: U2.16 U3.4
RX: TP2.TP U2.24
SCK: D10.2 J1.13 J4.P5 R6.1 TP8.TP U1.6 U2.6
SCL: J3.4 R2-PINH.1 SENSOR2.4 U2.20 U3.16 U4.7
SDA: J3.3 R1-PINH.1 SENSOR2.3 U2.19 U3.15 U4.8
SRC: C4.2 D5.2 L1.1 Q3.3
SS_SD: D8.2 J4.P2 R10.1 U2.4
TX: TP1.TP U2.25
USB_D+: D1.4 U2.14
USB_D-: D1.6 U2.13
VBAT [powertrails]: C2_BAT.1 MCP73831.3 Q1.3 TP3.TP U4.2 U4.3
VBUS [powertrails]: C1_BAT.1 C4_USB.1 C5_USB.1 CHG_LED.A D1.2 D2.2 MCP73831.4 PFMF.050.1.2 Q1.1 R1_PWRUSB.2 TP14.TP
VRTC [powertrails]: C8.1 C10_SUPERCAP.2 R_CAPACITOR.1 U3.14
VUSB [powertrails]: J2.A4 J2.A9 J2.B4 J2.B9 PFMF.050.1.1

## Tracks (layer width: path | path; a pad name or v marks a point on that pad's centre or on a via)
3V3  (via drill 0.3)
  Top 0.3: 47.23,103.03 47.78,103.03 IC1.2 47.92,102.89 48.34,102.89 50.14,104.69 51.93,104.69 55.39,108.15 60.66,108.15 R_CHANGE.1 | 47.23,103.03 45.98,104.27 v45.98,107.32 45.98,107.87 45.84,108.01 R_RESET.2 | 20.5,107.46 12.33,99.29 11.49,99.29 11.36,99.15 | 20.5,107.46 20.77,107.73 20.77,108.01 R_BOOT.1 | 11.36,99.15 R10.2 10.54,98.45 10.53,98.45 9.97,97.9 C9.1 9.83,97.76 9.7,97.62 9.7,92.02 6.99,89.31 5.68,89.31 J4.P4 | 20.5,107.46 v20.64,107.32 | 41.27,56.49 41.27,57.04 U1.8 41.13,57.04 40.03,57.04 39.2,57.88 35.59,57.88 | 41.27,56.49 41.27,55.94 U1.7 | R5.2 31.86,48.87 v31.86,49.56 31.86,53.72 32.69,54.55 33.38,54.55 U1.3 33.52,54.55 34.07,54.55 34.21,54.69 34.21,56.63 35.46,57.88 35.59,57.88 | R6.2 50.28,37.38 48.61,37.38 R7.2 48.48,37.38 46.67,37.38 R8.2 46.54,37.38 25.35,37.38 22.44,40.28 | U2.2 9.14,46.38 9.14,44.35 12.07,41.42 14.53,41.42 16.16,43.05 R1.2 19.22,43.05 19.22,42.07 20.97,40.32 22.4,40.32 22.44,40.28 | 22.44,40.28 v22.58,40.42 | R9.2 75.07,23.39 76.17,22.28 76.45,22.28 R_CL1.1 76.59,22.14 77.01,22.14 77.7,22.83 79.5,22.83 | 79.5,22.83 80.19,22.83 Q2.3 | 87.67,60.64 86.56,60.64 R1-PINH1.2 | 87.67,60.64 88.36,60.64 R2-PINH1.2 | 87.67,60.64 U3.2 87.67,58.43 87.67,58.01 86.15,56.49 41.27,56.49 | 92.93,49.01 92.93,61.06 92.52,61.48 88.78,61.48 88.36,61.06 88.36,60.78 R2-PINH1.2 | 124.51,44.99 126.73,44.99 127.7,45.96 128.25,45.96 C3.+ 128.39,45.96 128.94,45.41 131.57,45.41 C1_BAT2.1 131.71,45.41 132.13,45.41 158.72,18.82 165.2,18.82 J3.2 | 124.51,44.99 124.23,44.99 IC4.5 124.51,44.99 | 92.93,49.01 109.14,49.01 117.59,40.56 120.08,40.56 124.51,44.99
  Top 0.3: 47.23,103.03 44.32,100.12 44.32,68.82 35.59,60.09 35.59,57.88 | R2-PINH1.2 88.56,60.65 89.3,59.92 91.33,59.92 D7.2 | TP16.TP 11.2,99.31 11.36,99.15 | 79.5,22.83 79.5,25.1 79.3,25.3 79.3,35.38 92.93,49.01
  Bottom 0.3: v20.64,107.32 v45.98,107.32 | v31.86,49.56 22.71,40.42 v22.58,40.42
32KHZ  (via drill 0.3)
  Top 0.15: R2-PINH1.1 89.89,60.64 90.72,60.64 91.06,60.99 92.33,60.99 92.45,60.87 92.45,59.91 91.94,59.4 89.47,59.4 89.06,58.98 89.06,58.57 U3.1 88.92,58.43 88.92,57.32 86.84,55.24 40.72,55.24 40.03,54.55 40.03,53.3 36.84,50.12 35.87,50.12 v35.86,50.11 | v18.7,45.27 18.28,45.27 18,45.55 18,46.38 U2.9
  Bottom 0.15: v18.7,45.27 22.16,45.27 27,50.11 v35.86,50.11
DN  (via drill 0.3)
  Top 0.15: 162.6,53.72 162.74,53.58 163.57,53.58 J2.B7 | 162.6,53.72 162.6,54.27 162.88,54.55 163.57,54.55 J2.A7 | 162.6,53.72 v162.46,53.58 | D1.1 152.77,54.14 153.32,54.14 154.41,55.23 156.41,55.23 v156.92,54.72
  Bottom 0.15: v162.46,53.58 160.94,53.58 159.8,54.72 v156.92,54.72
DP  (via drill 0.3)
  Top 0.15: 164.54,54.14 164.4,54 163.71,54 J2.A6 | 164.54,54.14 164.54,54.83 164.26,55.1 163.71,55.1 J2.B6 | v154.01,52.2 152.77,52.2 D1.3 | 164.54,54.14 v164.68,54
  Bottom 0.15: v154.01,52.2 162.88,52.2 v164.68,54
EPD_3V3  (via drill 0.3, 0.35)
  Top 0.3: 83.24,15.49 82.82,15.49 J1.16 | 83.24,15.49 J1.15 83.24,15.49 | 86.7,18.96 88.09,18.96 C7.1 | 86.7,18.96 85.73,18.96 EPD_C5.1 85.59,18.82 85.59,18.54 v85.18,18.12 | 83.24,15.49 83.24,16.05 82.96,16.32 v82.82,16.32 | 83.38,23.94 85.45,26.02 85.45,26.7 | 83.38,23.94 81.3,21.86 78.25,21.86 Q2.2 | 85.45,26.7 85.45,26.71 L1.2 | 86.7,18.96 86.7,20.76 83.52,23.94 83.38,23.94 | TP17.TP 89.37,37.67 88.4,36.7 v88.4,36.1 | v86.8,27.6 85.9,26.7 85.45,26.7
  Bottom 0.3: v82.82,16.32 83.38,16.32 v85.18,18.12 | v88.4,36.1 88.4,28.5 87.5,27.6 v86.8,27.6
EPD_3V3_C  (via drill 0.3)
  Top 0.3: 76.73,23.53 77.97,23.53 78.11,23.66 Q2.1 | 76.73,23.53 76.59,23.53 R_CL1.2 76.73,23.53 | v24.79,61.89 21.74,61.89 20.5,63.14 20.5,63.83 U2.18 20.42,63.97 TP13.TP | 76.73,23.53 v76.04,24.22
  Bottom 0.3: v24.79,61.89 62.46,24.22 v76.04,24.22
EPD_BUSY
  Top 0.15: J1.9 86.28,15.36 86.28,15.15 84.48,13.35 78.99,13.35 77.4,14.94 71.05,14.94 70.77,15.22 37.12,15.22 16.57,35.77 13.27,35.77 9.97,39.07 9.97,42.37 6.79,45.55 6.79,59.26 10.11,62.58 10.11,63.69 10.25,63.83 U2.26 10.3,63.97 TP9.TP
EPD_CS  (via drill 0.3)
  Top 0.15: J1.12 84.76,15.49 84.76,16.05 83.24,17.57 83.1,17.57 82.41,18.26 76.87,18.26 75.76,19.37 75.34,19.37 D6.2 75.21,19.51 75.07,19.65 75.07,22.14 R9.1 74.93,22.14 74.51,22.14 v74.1,22.56 | 20.5,45.69 20.5,46.38 U2.11 | 20.5,45.69 26.32,39.87 v46.1,39.87 v46.11,39.86 | TP10.TP 21.6,44.58 20.5,45.69
  Bottom 0.15: v46.11,39.86 46.33,39.86 63.63,22.56 v74.1,22.56
EPD_DC  (via drill 0.3)
  Top 0.15: v85.18,16.32 85.32,16.19 85.32,15.49 J1.11 | 12.93,45.63 12.88,45.69 12.88,46.38 U2.5 | 12.93,45.63 v13.3,45.27 | TP11.TP 12.93,43.57 12.93,45.63
  Bottom 0.15: v13.3,45.27 44.6,13.97 81.52,13.97 83.88,16.32 v85.18,16.32
EPD_RST  (via drill 0.3, 0.35)
  Top 0.15: v18.14,61.61 16.62,63.14 16.62,63.83 U2.21 16.6,63.98 v16.6,65.5 | v78.53,14.52 78.63,14.52 79.53,13.62 84.26,13.62 85.73,15.1 85.73,15.43 J1.10 | TP12.TP 15.5,69.9 16.7,68.7 16.7,68.2 v16.6,68.1
  Bottom 0.15: v78.53,14.52 47.78,14.52 18.14,44.16 v18.14,61.61 | v16.6,68.1 16.6,65.7 v16.6,65.5
FLASH_CS  (via drill 0.3)
  Top 0.15: D9.2 33.38,47.49 31.86,47.49 R5.1 31.72,47.49 31.3,47.49 30.89,47.9 30.89,48.32 | 30.89,48.32 30.89,54.55 32.83,56.49 32.96,56.49 33.38,56.91 33.38,57.04 U1.1 | v22.85,45.27 22.16,45.27 21.74,45.69 21.74,46.38 U2.12 | 30.89,48.32 29.92,48.32 v29.91,48.33
  Bottom 0.15: v29.91,48.33 26.85,45.27 v22.85,45.27
GDR
  Top 0.15: 70.22,13.28 70.36,13.14 70.5,13.14 71.15,12.48 72.55,12.48 72.68,12.35 87.3,12.35 89.75,14.8 89.75,15.36 J1.2 | 70.22,13.28 70.22,13.97 Q3.1 | 70.22,13.28 70.08,13.14 69.53,13.14 68.97,12.58 68.97,12.03 R4.1
GND  (via drill 0.35)
  Top 0.15: TP5.TP TP4.TP | U2.29_5 13.57,53.72 13.57,54.83 U2.29_6 | J4.G4 2.97,91.93 v3.49,91.41 v3.49,91.4 | v4.4,91.4 J4.P6 | MCP73831.2 125.6,53.8 125.8,54 125.8,54.3 v125.7,54.4
  Top 0.152: v162.6,57.8 162.75,57.65 J2.A12 J2.B1 | v162.6,58.9 163.2,59.5 163.3,59.5 164.11,59.5 J2.MP4 | D6.1 71.4,19.4 v71,19 | v72,16.3 72.55,15.75 EPD_C12.2 EPD_C11.2 | U4.9 136.15,55.75 U4.6 | J1.17 82.25,15.05 v82.8,14.5 | J1.8 86.7,15.4 86.7,14.67 86.54,14.5 v86.3,14.5 | C5_USB.2 151,55.45 152.05,55.45 152.65,55.45 | v53.6,104.3 53.6,103.55 C_DELAY.2 | BOOT_BUTTON.1 22.25,106.75 v23.2,105.8 | v25.2,105.8 25.75,106.35 BOOT_BUTTON.2 | IC4.2 120.1,44 120,43.9 v120,43.8 | v119.4,42.4 119.4,41.55 C1_BAT1.2 | SENSOR2.1 154.3,14.4 v154.54,14.16 | R4.2 71.16,12 71.37,12.2 72.43,12.2 72.64,12 73.5,12 74.1,11.4 74.1,11.1 73.35,10.35 R2.1 72.45,10.35 v73.3,9.5 | v47.9,44.9 48.5,44.3 D11.1 | v46.99,44.9 46.99,44.79 46.4,44.2 D12.1 46.25,42.8 v43,42.8 | C1_BAT.2 129.44,57.26 130.7,56 130.8,55.9 v131,55.9 | D9.1 34.85,48.85 35.1,48.6 v35.2,48.5 | RESET_BUTTON.1 47.25,106.75 47.5,106.5 47.6,106.4 v47.8,106.4 | v50.8,107 50.75,107.05 RESET_BUTTON.2 | J1.MP2 77.25,12.95 76.9,13.3 76.1,13.3 75.9,13.1 75.8,13 v75.6,13 | D1.5 156.73,53.1 156.94,52.89 158.7,52.89 159.14,53.33 159.14,55.77 158.56,56.35 156.4,56.35 156.35,56.35 v155.9,56.8 | 152.65,55.45 v152.4,55.7 | 152.65,55.45 154.24,55.45 154.3,55.51 157.54,55.51 C4_USB.2 | C5.2 53.35,106.9 v53.35,106.85 | v132.31,56.51 132.31,57.56 C2_BAT.2 | v155.14,13.26 155.1,13.22 SENSOR2.7
  Bottom 0.15: v3.49,91.4 v4.4,91.4 | v125.7,54.4 129.5,54.4 v131,55.9
  Bottom 0.152: v162.6,57.8 v162.6,58.9 | v71,19 71,17.3 v72,16.3 | v82.8,14.5 v86.3,14.5 | v23.2,105.8 v25.2,105.8 | v120,43.8 120,43.1 119.4,42.5 v119.4,42.4 | v47.9,44.9 v46.99,44.9 | v131,55.9 131.8,55.9 132.3,56.4 v132.3,56.5 v132.31,56.51 | v35.2,48.5 40.9,42.8 42.8,42.8 v43,42.8 | v47.8,106.4 49.2,106.4 50.2,106.4 v50.8,107 | v75.6,13 74.6,12 74.6,10.8 74.6,10.5 73.6,9.5 v73.3,9.5 | v155.9,56.8 152.7,56.8 152.4,56.5 v152.4,55.7 | v53.35,106.85 53.6,106.6 v53.6,104.3 | v155.14,13.26 155.1,13.3 155.1,13.6 v154.54,14.16
  pour Top: 67.94,110.14 67.92,110.12 20.18,110.12 20.16,110.14 20.14,110.16 20.12,110.18 20.12,111.12 0.18,111.12 0.18,0.18 75.22,0.18 75.22,10.22 75.24,10.24 75.26,10.26 75.28,10.28 93.72,10.28 93.74,10.26 93.76,10.24 93.78,10.22 93.78,0.18 170.02,0.18 170.02,67.02 92.08,67.02 92.06,67.04 92.04,67.06 92.02,67.08 92.02,111.02 67.98,111.02 67.98,110.18 67.96,110.16
  pour Bottom: 67.94,110.14 67.92,110.12 20.18,110.12 20.16,110.14 20.14,110.16 20.12,110.18 20.12,111.12 0.18,111.12 0.18,0.18 75.22,0.18 75.22,10.22 75.24,10.24 75.26,10.26 75.28,10.28 93.72,10.28 93.74,10.26 93.76,10.24 93.78,10.22 93.78,0.18 170.02,0.18 170.02,67.02 92.08,67.02 92.06,67.04 92.04,67.06 92.02,67.08 92.02,111.02 67.98,111.02 67.98,110.18 67.96,110.16
GPIO8
  Top 0.15: R1.1 19.25,44.44 19.25,46.38 U2.10
I2C_PW  (via drill 0.3)
  Top 0.3: C1.1 156.8,5.75 156.75,5.7 156.15,5.7 C2.1 156.04,5.75 155.99,5.75 155.37,6.38 154.8,6.38 154.62,6.55 | 154.62,6.55 154.8,6.73 154.8,7.19 154.8,7.2 | 154.62,6.55 154.53,6.45 154.2,6.45 R1-PINH.2 | 154.29,13.15 154.29,13.2 154.29,13.5 154.14,13.64 v154.1,13.64 | 154.29,13.15 154.29,12.17 SENSOR2.8 154.29,12.03 154.29,11.48 154.84,10.92 154.84,7.68 154.8,7.55 154.8,7.2 | 155.12,14.23 155.12,14.94 SENSOR2.2 | 155.12,14.23 155.12,13.98 154.29,13.15 | 155.12,14.23 155.95,13.4 155.95,12.17 SENSOR2.6 | v22.02,62.72 21.74,63 21.74,63.83 U2.17 | 154.8,7.2 R2-PINH.2
  Bottom 0.3: v22.02,62.72 28.02,62.72 64.58,26.16 141.59,26.16 v154.1,13.64
INT_RTC  (via drill 0.3)
  Top 0.15: U3.3 86.42,58.57 86.42,59.54 85.32,60.64 R1-PINH1.1 85.18,60.64 85.04,60.51 v84.48,60.51 84.1,60.89 TP15.TP | v43.07,52.33 40.86,52.33 34.49,45.96 30.75,45.96 29.09,47.62 17.04,47.62 16.76,47.35 16.76,46.52 U2.8
  Bottom 0.15: v43.07,52.33 76.31,52.33 v84.48,60.51
IO/BOOT
  Top 0.15: R_BOOT.2 20.91,109.4 22.12,109.55 BOOT_BUTTON.4 22.5,109.67 23.27,109.67 24.24,108.7 | C6.1 27.15,109.4 25.9,109.4 BOOT_BUTTON.3 25.73,109.53 25.07,109.53 24.24,108.7 | 24.24,108.7 24.24,63.97 U2.15
IO/CHANGE  (via drill 0.3)
  Top 0.15: 65.78,109.54 65.93,109.4 67.17,109.4 C10.1 | CHANGE_BUTTON.3 65.78,109.54 | v23.68,74.22 14.13,64.66 14.13,63.97 U2.23 | v59.97,108.98 60.39,109.4 60.66,109.4 R_CHANGE.2 60.8,109.4 62.05,109.4 62.14,109.49 CHANGE_BUTTON.4 62.64,109.67 65,109.67 65.1,109.77 | 65.55,109.77 65.1,109.77 | 65.55,109.77 65.1,109.77 | 65.55,109.77 65.65,109.67 65.78,109.54
  Bottom 0.15: v23.68,74.22 25.21,74.22 v59.97,108.98
MISO  (via drill 0.3)
  Top 0.15: R8.1 46.67,38.76 46.67,40.98 46.54,41.12 D12.2 46.4,41.12 45.98,41.12 45.58,41.52 v45.58,41.82 | v33.38,55.24 33.38,55.8 U1.2 | J4.P7 5.68,92.5 5,92.5 4.85,92.5 3.95,91.6 3.95,86.2 8.83,81.31 8.83,64.13 U2.27 9.14,63.83 9.14,63.14 v9.56,62.72
  Top 0.152: TP6.TP 5.8,103.8 4.6,102.6 4.6,93.43 5,93.03 5,92.5
  Bottom 0.15: v9.56,62.72 10.11,62.17 22.16,62.17 22.31,62.32 25.06,62.32 32.13,55.24 v33.38,55.24 33.38,54.02 v45.58,41.82
MOSI  (via drill 0.3, 0.35)
  Top 0.15: J1.14 83.79,15.49 83.79,16.05 82.13,17.71 71.26,17.71 51.04,37.93 49.72,37.93 48.89,38.76 48.61,38.76 R7.1 48.48,38.76 48.48,41.12 | 42.1,53.3 42.8,53.3 47.45,48.65 47.45,41.73 48.06,41.12 48.48,41.12 | 42.1,53.3 41.27,53.3 U1.5 41.27,53.17 34.35,46.24 30.89,46.24 29.22,47.9 16.07,47.9 15.37,47.21 15.37,46.52 U2.7 | 48.48,41.12 D11.2 48.48,41.12 | v8.31,88.21 5.82,88.21 J4.P3 | 42.1,53.3 v42.1,53.44
  Top 0.152: TP7.TP 8.5,92 8.3,91.8 v8.2,91.7
  Bottom 0.15: v8.31,88.21 8.4,88.21 8.59,88.21 42.1,54.69 v42.1,53.44
  Bottom 0.152: v8.2,91.7 8.4,91.5 8.4,88.21
N$1  (via drill 0.3)
  Top 0.15: v161.08,54.14 158.44,51.5 154.7,51.5 154.57,51.36 154.15,51.36 153.87,51.09 153.87,50.53 R2-USB.1 | v162.6,55.66 162.6,55.8 162.88,56.07 163.57,56.07 J2.B5
  Bottom 0.15: v162.6,55.66 v161.08,54.14
N$2
  Top 0.15: C1_BAT1.1 118,41.53 118,43.05 D2.1 118.14,43.05 119.36,43.05 | 119.36,43.05 120.36,43.05 121.19,43.05 IC4.3 | 119.36,43.05 119.36,44.28 119.93,44.86 121.19,44.86 IC4.1 121.33,44.86 121.74,44.86 124.23,47.35 131.16,47.35 133.38,49.56 133.93,49.56 Q1.2
N$3  (via drill 0.35)
  Top 0.15: R1_BAT.1 121.05,52.75 121.05,53.3 120.63,53.72 120.5,53.72 120.22,54 120.22,54.97 120.5,55.24 121.35,56.1 122,56.1 122.2,56.1 v122.4,55.9 | v123.8,52.4 124.45,52.4 MCP73831.1
  Bottom 0.15: v122.4,55.9 123.7,54.6 123.7,52.4 v123.8,52.4
N$4
  Top 0.15: R2-USB1.2 155.26,49.15 156.7,49.15 161.55,54 161.55,57.39 162.41,58.25 162.79,58.25 163.03,58.01 164.95,58.01 165.51,57.46 165.51,54.14 164.4,53.03 163.71,53.03 J2.A5
N$5
  Top 0.15: CHG_LED.C 121.19,54.41 121.19,54 121.6,53.58 122.02,53.58 122.43,53.17 122.43,52.75 R1_BAT.2
N$6
  Top 0.15: C4.1 94.46,27.13 93.63,27.13 93.07,27.68 92.66,27.68 D4.1 92.52,27.54 91.96,27.54 88.36,31.14 85.04,31.14 D3.2
N$7
  Top 0.15: J1.24 78.67,15.49 76.73,15.49 75.76,16.46 75.62,16.32 74.51,16.32 73.68,17.16 EPD_C12.1
N$8
  Top 0.15: R2_BAT.2 118.97,54.41 118.97,53.58 120.63,51.92 122.99,51.92 123.27,52.2 123.27,52.51 124.65,53.89 MCP73831.5
N$9
  Top 0.15: IC1.5 50.83,103.86 50.83,103.58 51.11,103.3 52.08,103.3 C_DELAY.1
N$10  (via drill 0.3)
  Top 0.15: v79.22,17.16 79.78,16.6 79.78,15.49 J1.22 | v77.56,18.82 78.39,18.82 EPD_C10.1
  Bottom 0.15: v77.56,18.82 v79.22,17.16
N$11  (via drill 0.35)
  other vias: 13.7,65.7
N$12  (via drill 0.3)
  Top 0.15: v80.75,16.88 80.75,15.49 J1.20 | v82.13,19.65 82.13,19.51 81.44,18.82 EPD_C8.1
  Bottom 0.15: v80.75,16.88 80.75,18.26 v82.13,19.65
N$13  (via drill 0.3)
  Top 0.15: v82.13,17.02 81.3,16.19 81.3,15.49 J1.19 | v83.24,18.12 82.82,18.54 82.82,18.82 EPD_C7.1
  Bottom 0.15: v83.24,18.12 v82.13,17.02
N$14  (via drill 0.3)
  Top 0.15: v82.13,16.32 81.85,16.32 81.72,16.19 81.85,16.05 81.85,15.49 J1.18 | v83.93,18.12 84.35,18.54 84.35,18.82 EPD_C6.1
  Bottom 0.15: v83.93,18.12 v82.13,16.32
N$15
  Top 0.15: R_CAPACITOR.2 91.69,50.4 91.69,58.29 D7.1
N$16  (via drill 0.35)
  other vias: 14.7,66.7
N$17  (via drill 0.35)
  other vias: 13.8,67.8
N$22
  Top 0.15: J1.4 88.78,15.49 88.78,16.05 91.27,18.54 91.27,18.82 EPD_C1.1
N$23
  Top 0.15: J1.5 88.22,15.49 88.22,17.02 90.03,18.82 EPD_C2.1
PREVGH  (via drill 0.3)
  Top 0.15: v80.19,17.16 80.19,15.49 J1.21 | v80.61,19.65 80.61,19.23 80.33,18.96 79.92,18.96 EPD_C9.1 | D5.1 89.02,23.53 84.64,23.53 v84.63,23.54
  Bottom 0.15: v80.19,17.16 80.19,19.23 v80.61,19.65 80.75,19.65 v84.63,23.54
PREVGL  (via drill 0.3)
  Top 0.15: 79.08,16.19 78.39,16.88 75.21,16.88 75.07,17.02 EPD_C11.1 | 79.08,16.19 79.22,16.05 79.22,15.49 J1.23 | v88.78,24.36 89.06,24.63 89.06,27.54 D4.2 | 79.08,16.19 v79.22,16.32
  Bottom 0.15: v88.78,24.36 81.3,16.88 81.3,16.74 80.88,16.32 v79.22,16.32
RESE
  Top 0.15: J1.3 89.19,15.36 89.19,14.8 87.46,13.07 78.52,13.07 77.06,14.52 73.68,14.52 73.54,14.39 73.54,13.69 R3.1 73.41,13.69 73.13,13.69 72.71,14.11 71.47,14.11 Q3.2
RESE'
  Top 0.15: 70.36,10.51 70.36,10.09 SJ1.2 70.36,10.51 | 70.36,10.51 70.36,10.65 71.33,11.61 71.88,11.61 R2.2 | 70.36,10.51 70.22,10.65 70.22,10.79 69.67,11.34 69.53,11.34 69.39,11.2 69.11,11.2 68.97,11.34 68.7,11.34 68.56,11.2 68.28,11.2 68.14,11.34 68.14,13.42 69.67,14.94 70.64,14.94 70.77,14.8 70.77,13.42 71.05,13.14 72.16,13.14 72.44,12.86 74.37,12.86 74.65,13.14 74.65,13.55 R3.2
RESET
  Top 0.15: C5.1 52.08,109.4 50.97,109.4 50.96,109.41 RESET_BUTTON.3 50.44,109.67 49.17,109.67 48.48,108.98 | 48.48,108.98 48.48,105.66 47.92,105.1 47.92,104 IC1.1 | 48.48,108.98 47.92,109.53 47.27,109.53 RESET_BUTTON.4 47.09,109.4 45.84,109.4 R_RESET.1 45.7,109.4 45.29,109.4 43.97,108.08 43.97,74.64 20.84,51.5 14.54,51.5 10.39,47.35 10.39,46.52 U2.3
RTC_RST  (via drill 0.3)
  Top 0.15: v27.15,64.11 25.9,62.86 23.41,62.86 22.99,63.28 22.99,63.83 U2.16 | U3.4 85.04,58.57 85.04,59.81 84.91,59.94 v36.16,59.94
  Bottom 0.15: v27.15,64.11 31.99,64.11 v36.16,59.94
RX
  Top 0.15: TP2.TP 12.9,64.03 U2.24
SCK  (via drill 0.3)
  Top 0.15: J1.13 84.21,15.49 84.21,16.05 82.27,17.99 71.37,17.99 50.6,38.76 50.41,38.76 | 50.41,38.76 R6.1 50.41,38.76 | 15.1,48.18 14.13,47.21 14.13,46.52 U2.6 | 15.1,48.18 29.36,48.18 31.02,46.52 34.21,46.52 40.3,52.61 40.3,53.58 40.72,54 40.86,54 41,54.14 41,54.55 41.13,54.69 U1.6 41.27,54.55 41.97,54.55 51.54,44.97 51.54,42.3 D10.2 50.41,41.12 50.41,38.76 | 6.79,90.28 5.82,90.28 J4.P5 | 15.1,48.18 v14.96,48.32 | 6.84,90.33 v7.01,90.16
  Top 0.152: TP8.TP 5.8,95.3 7.5,93.6 7.5,91 6.89,90.38 6.84,90.33 6.79,90.28
  Bottom 0.15: v14.96,48.32 9,54.27 9,85.71 7.03,87.69 v7.03,90.14 v7.01,90.16
SCL  (via drill 0.3)
  Top 0.15: 158.44,12.58 158.44,5.52 157.89,4.97 155.26,4.97 154.84,5.38 154.84,5.66 R2-PINH.1 | 158.44,12.58 156.64,14.39 156.64,14.94 SENSOR2.4 | v137.53,47.76 137.81,48.04 137.81,56.07 137.53,56.35 137.39,56.21 136.98,56.21 U4.7 | v163.71,21.59 164.26,21.03 164.26,20.89 164.64,20.52 J3.4 164.8,20.3 164.54,20.3 166.06,20.3 166.45,19.91 166.45,17.3 161.74,12.58 158.44,12.58 | v18.56,62.86 18.28,62.86 18,63.14 18,63.83 U2.20 | v88.78,50.67 88.92,50.53 88.92,49.29 U3.16
  Bottom 0.15: v163.71,21.59 v137.53,47.76 91.69,47.76 v88.78,50.67 88.22,51.23 41.13,51.23 28.81,63.55 19.8,63.55 19.11,62.86 v18.56,62.86
SDA  (via drill 0.3)
  Top 0.15: 155.95,15.77 155.67,16.05 153.87,16.05 153.46,15.63 153.46,14.52 153.6,14.39 153.6,7.18 R1-PINH.1 | 155.95,15.77 155.95,15.08 SENSOR2.3 | U4.8 136.98,56.77 137.53,56.77 138.08,56.21 v138.08,46.52 138.08,45.41 163.57,19.93 165.2,19.93 J3.3 165.31,19.84 165.85,19.3 166.06,19.3 166.18,19.18 166.18,17.42 165.78,17.02 157.2,17.02 155.95,15.77 | v19.8,62.86 19.53,62.86 19.25,63.14 19.25,63.83 U2.19 | v87.39,50.67 87.81,50.26 87.81,49.29 U3.15
  Bottom 0.15: v19.8,62.86 21.47,62.86 21.88,63.28 28.67,63.28 41.27,50.67 v87.39,50.67 91.55,46.52 v138.08,46.52
SRC  (via drill 0.3)
  Top 0.15: 93.49,24.63 92.66,23.8 92.66,23.53 D5.2 | 93.49,24.63 95.43,26.57 95.43,28.1 95.15,28.37 94.6,28.37 C4.2 | v72.16,17.16 71.19,16.19 70.91,16.19 Q3.3 | v79.81,25.5 79.81,25.63 80.88,26.71 | 80.88,26.71 L1.1 80.88,26.71 | 93.49,24.63 88.36,29.76 83.93,29.76 80.88,26.71
  Bottom 0.15: v79.81,25.5 78.91,25.5 72.16,18.76 v72.16,17.16
SS_SD  (via drill 0.3)
  Top 0.15: R10.1 11.36,97.76 11.77,97.76 12.46,97.07 12.88,97.07 D8.2 12.88,96.93 12.88,92.08 7.48,86.68 v7.34,86.68 6.92,87.1 6.23,87.1 J4.P2 | v11.63,47.9 11.63,46.52 U2.4
  Bottom 0.15: v11.63,47.9 11.63,51.23 7.34,55.52 v7.34,86.68
TX
  Top 0.15: TP1.TP 12.9,73.3 11.7,72.1 11.7,71.1 11.7,69.3 11.7,64.1 U2.25
USB_D+  (via drill 0.3)
  Top 0.15: v153.6,51.64 154.15,51.64 154.57,52.06 155.12,52.06 D1.4 | v41.27,51.78 40.72,51.78 34.62,45.69 25.21,45.69 24.38,46.52 U2.14
  Bottom 0.15: v153.6,51.64 41.41,51.64 v41.27,51.78
USB_D-  (via drill 0.3)
  Top 0.15: v45.57,45.96 35.32,45.96 34.62,45.27 23.55,45.27 22.99,45.83 22.99,46.38 U2.13 | D1.6 155.26,54.14 156.01,54.14 156.64,53.51 156.72,53.51 157.06,53.17 158.58,53.17 158.86,53.44 158.86,55.66 158.44,56.07 154.57,56.07 154.49,56.15 148.83,56.15 v138.64,45.96
  Bottom 0.15: v138.64,45.96 v45.57,45.96
VBAT
  Top 0.3: U4.2 134.9,56.21 134.9,55.8 U4.3 134.25,55.75 134.21,55.8 133.93,55.8 133.1,54.97 | 133.1,54.97 133.1,51.78 Q1.3 | 133.1,54.97 131.16,56.91 131.16,57.6 C2_BAT.1 131.02,57.6 | 131.02,57.6 130.84,57.6 130.55,57.89 128.04,57.89 127.13,56.97 127.13,54.44 126.55,53.86 MCP73831.3 | TP3.TP 131.2,57.78 131.02,57.6
VBUS  (via drill 0.3, 0.35)
  Top 0.3: 150.83,52.75 151.52,52.75 151.8,53.03 152.63,53.03 D1.2 152.77,53.17 153.46,53.17 154.27,53.98 154.27,54.47 154.44,54.63 156.01,54.63 156.78,53.86 C4_USB.1 | 150.83,52.75 149.58,52.75 C5_USB.1 149.44,52.75 v146.12,52.75 | 150.83,52.75 150.83,46.79 PFMF.050.1.2 | 132.13,52.61 132.13,49.7 Q1.1 | 130.19,54.55 129.08,55.66 | 130.19,54.55 132.13,52.61 | 129.08,55.66 129.08,55.94 C1_BAT.1 | R1_PWRUSB.2 115.92,45.27 118,45.27 D2.2 118.14,45.27 118.56,45.27 124.76,51.47 127.11,51.47 130.19,54.55 | 122.57,54.55 CHG_LED.A 124.05,56 124.5,56 125.55,56 | 132.13,52.61 v132.27,52.75 | TP14.TP 128.5,63.3 128.4,63.2 128.3,63.1 v128.3,62.7 128.3,58.75 125.55,56 | v128.1,55.8 128.94,55.8 129.08,55.66 | 125.55,56 MCP73831.4
  Bottom 0.3: v132.27,52.75 v146.12,52.75 | v128.3,62.7 128.3,61.7 127.4,60.8 127.4,56.1 127.6,55.9 127.7,55.8 v128.1,55.8
VRTC
  Top 0.3: 86.42,47.76 86.42,49.15 U3.14 | 86.42,47.76 86.42,47.62 86.15,47.35 85.73,47.35 C8.1 85.73,47.21 85.73,46.79 86.15,46.38 86.15,44.99 C10_SUPERCAP.2 | 86.42,47.76 89.33,47.76 90.58,49.01 91.55,49.01 R_CAPACITOR.1
VUSB
  Top 0.3: J2.A4 163.71,51.78 163.71,51.92 J2.B9 163.57,51.92 162.88,51.92 161.91,52.89 | J2.A9 J2.B4 162.4,56.55 161.91,56.06 161.91,52.89 | 161.91,52.89 160.94,52.89 155.94,47.9 PFMF.050.1.1